# Altium PCB LM2596_PCB.PcbDoc
Units mm, origin at the board's own origin, x right, y up, seen from the top; angles counter-clockwise.
Board outline 51.43 x 25.02 mm, 2 copper layers (Top Layer, Bottom Layer); 8 components, 5 nets, 24 pads, 0 vias.
Unrouted connection lines stored in the file: 5.
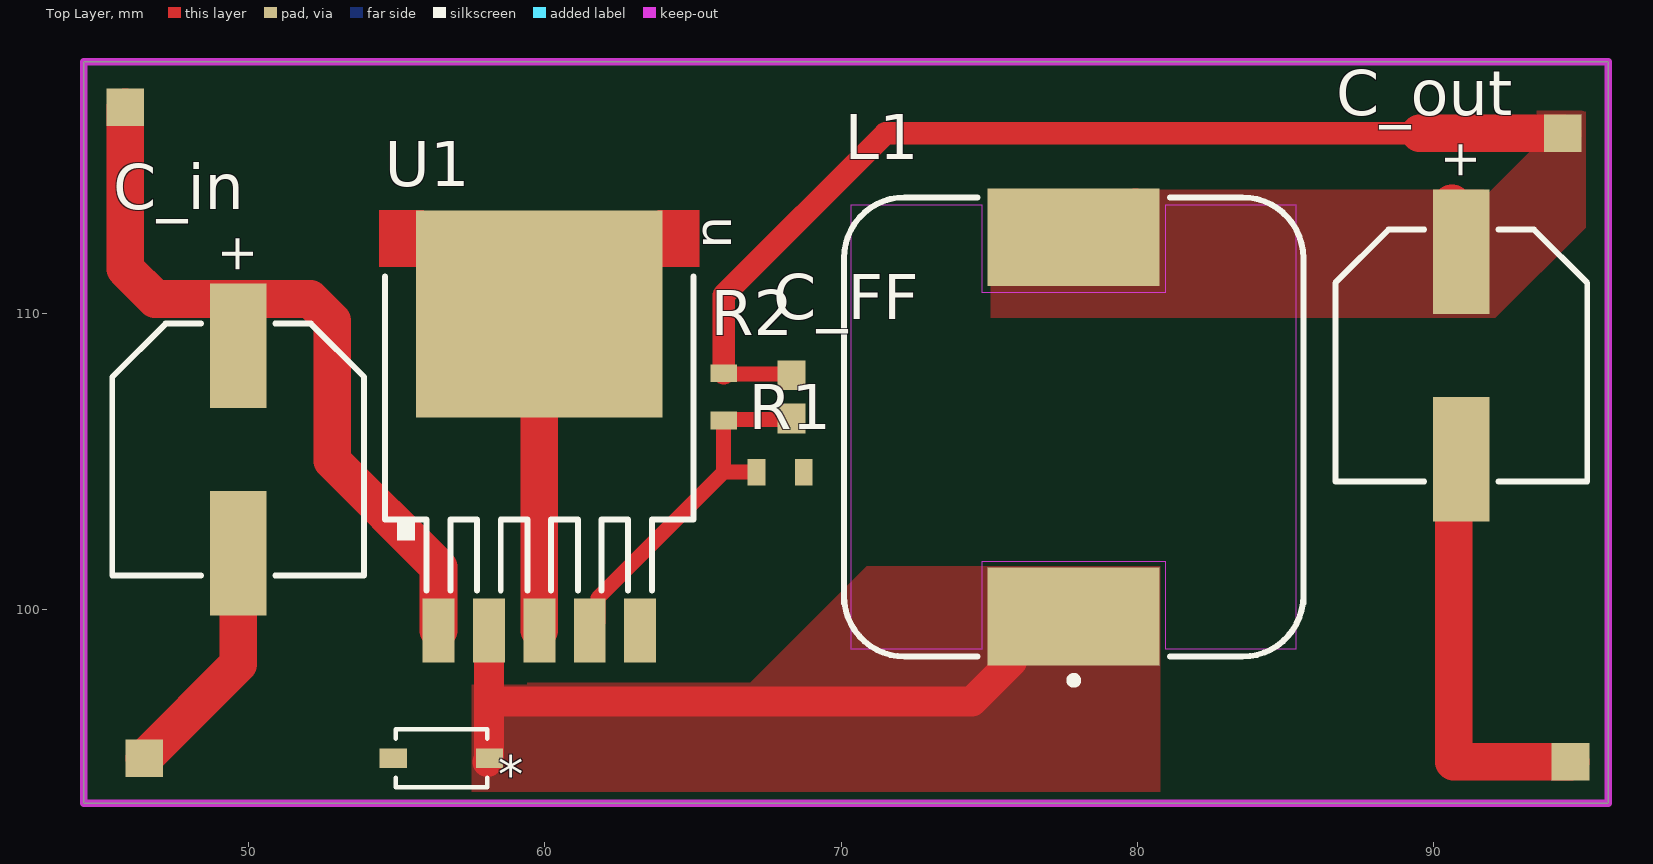
[diagram p0: Top Layer view]
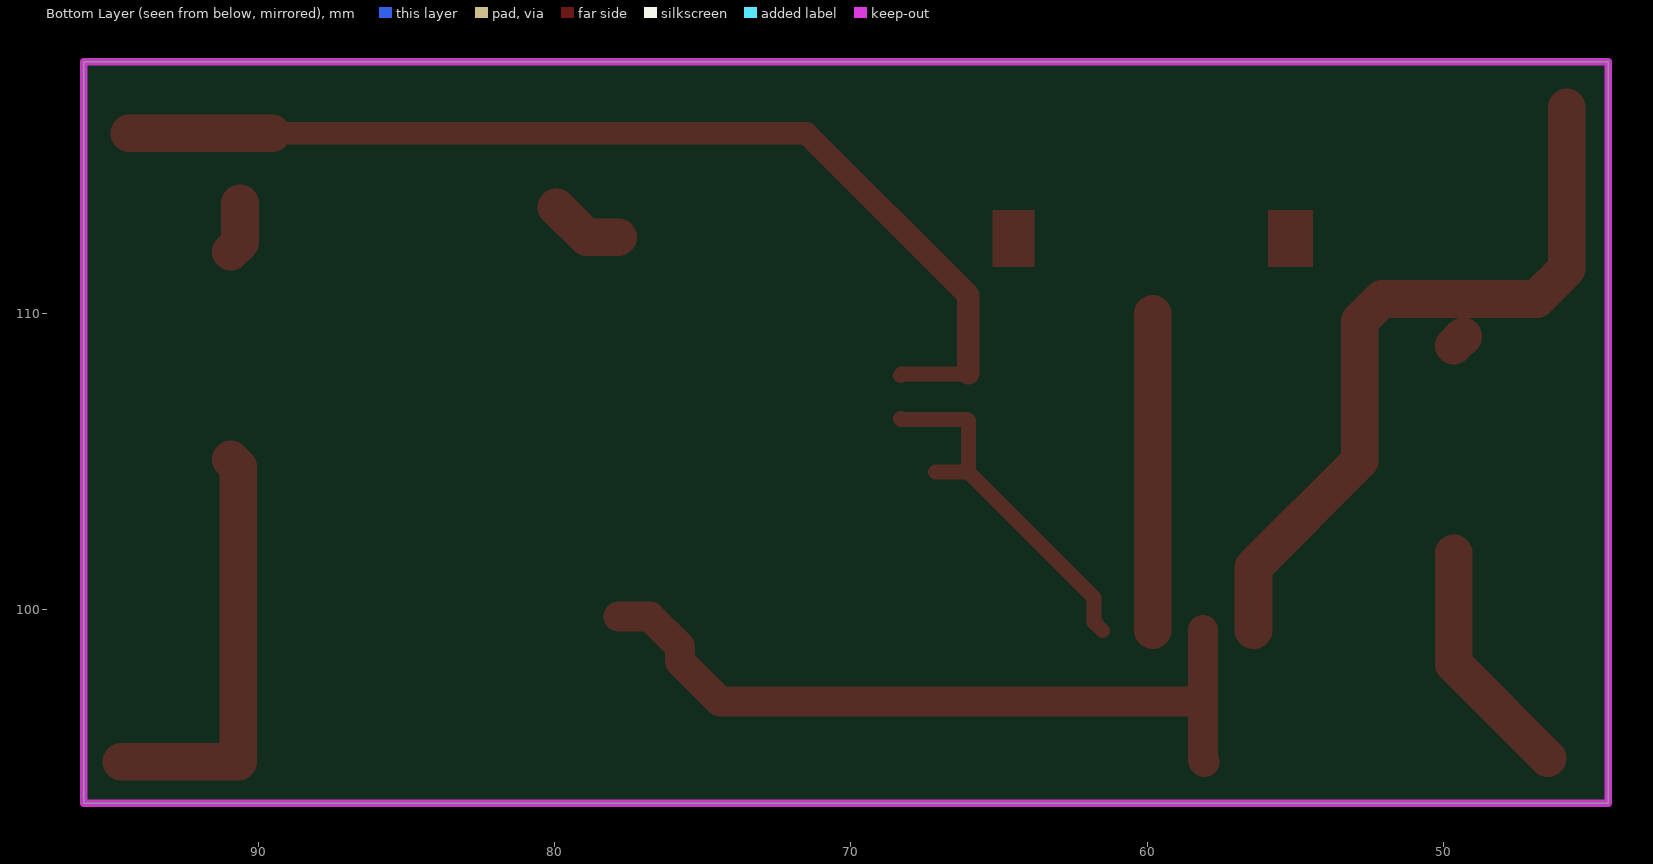
[diagram p1: Bottom Layer view, seen from below]
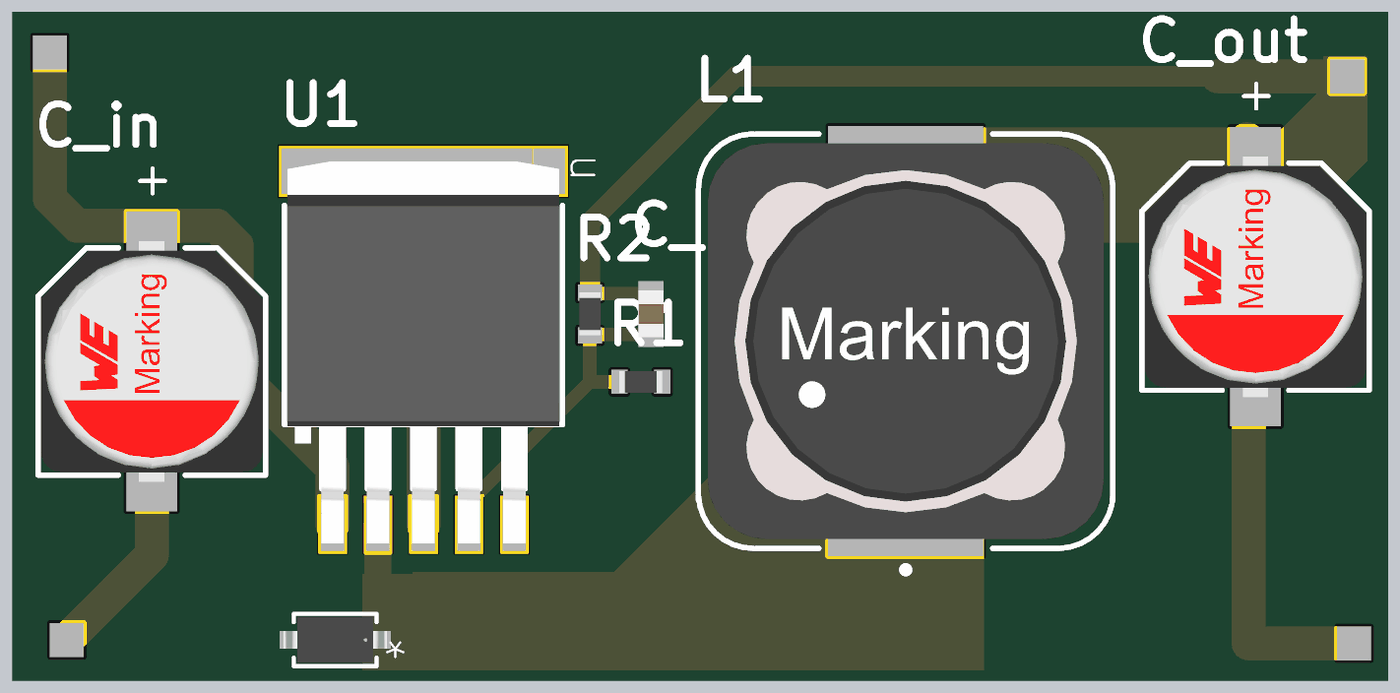
[diagram p2: 3D render of the assembled board from above, using the file's embedded part models]

## Layer stack, top to bottom
Top Solder: solder mask 0.0102, Solder Resist, Dk 3.5
Top Layer: signal copper 0.0356
Dielectric 1: dielectric 0.32, FR-4, Dk 4.8
Bottom Layer: signal copper 0.0356
Bottom Solder: solder mask 0.0102, Solder Resist, Dk 3.5

## Board outline
44.45,93.472 44.45,118.491 95.885,118.491 95.885,93.472

## Design rules (kind name [scope] priority, off if disabled: settings)
Clearance [All] p1: gap=0.254 ignorepadtopadclearanceinfootprint=FALSE
PolygonConnect PolygonConnect_2 [All vs IsNamedPolygon('NetC_FF_2')] p1: thpad.connectstyle=Direct thpad.reliefconductorwidth=0.254 thpad.reliefentries=4 thpad.polygonreliefangle="90 Angle" thpad.airgapwidth=0.254 smdpad.connectstyle=Direct smdpad.reliefconductorwidth=0.254 smdpad.reliefentries=4 smdpad.polygonreliefangle="90 Angle" smdpad.airgapwidth=0.254 via.connectstyle=Relief via.reliefconductorwidth=0.254 via.reliefentries=4 via.polygonreliefangle="90 Angle" via.airgapwidth=0.254
PolygonConnect PolygonConnect_1 [All vs IsNamedPolygon('NetC_FF_2')] p2: thpad.connectstyle=Direct thpad.reliefconductorwidth=0.254 thpad.reliefentries=4 thpad.polygonreliefangle="90 Angle" thpad.airgapwidth=0.254 smdpad.connectstyle=Direct smdpad.reliefconductorwidth=0.254 smdpad.reliefentries=4 smdpad.polygonreliefangle="90 Angle" smdpad.airgapwidth=0.254 via.connectstyle=Relief via.reliefconductorwidth=0.254 via.reliefentries=4 via.polygonreliefangle="90 Angle" via.airgapwidth=0.254
PolygonConnect [All] p3: connectstyle=Relief reliefconductorwidth=0.762 reliefentries=4 polygonreliefangle="90 Angle" airgapwidth=0.762
RoutingVias [All] p1: holewidth=0.762 width=1.27 viastyle="Through Hole" minholewidth=0.762 minwidth=1.27 maxholewidth=0.762 maxwidth=1.27
SolderMaskExpansion [All] p1: expansion=0.102 istentingtop=FALSE
Width [All] p1: maxlimit=1.27 minlimit=0.508 preferedwidth=0.762 minimp=50.000000 maximp=50.000000 favimp=50.000000
30 further rules are at their usual default settings.

## Classes and differential pairs
component class 01_Schematic: C_FF C_in C_out L1 R1 R2 U1

## Components (designator, comment, footprint, x,y, rotation, side; value= is the part's Value field where it differs from the comment)
C_FF "C1206C104K5RACTU" CAPC17595_87N_KEM_0603 68.326,107.188 r90 top
C_in "?µF" WCAP-AS5H_D8H10.5 49.657,105.41 r90 top
C_out "?µF" WCAP-AS5H_D8H10.5 90.932,108.585 r90 top
D1 "BZT52C5V1-E3-08" CR_5V1-E3-08_VIS-L 56.515,94.996 r180 top
L1 "?uH, ?A" WE-PD_1510 77.851,106.172 r0 top
R1 "Ω" WRIS-PSMB_0603_L1.6W0.8H0.3 67.945,104.648 r180 top
R2 "Ω" WRIS-PSMB_0603_L1.6W0.8H0.3 66.04,107.188 r90 top
U1 "LM2596S-12/NOPB" KTT0005B 59.817,104.648 r270 top

## Footprints (in the part's own frame and the unit in brackets; to place one, negate y for a bottom-side part, rotate by r counter-clockwise, add the part's x,y. Pads: shape width x height; smd on the part's side, far side on the other; paste and mask are expansions set on the pad)
CAPC17595_87N_KEM_0603 [mm]
  rect 1.006x0.95 smd paste+0 mask+0: 1(-0.728,0) 2(0.728,0)
  body extent -0.87,-0.48 0.87,0.48, height 0.87
CR_5V1-E3-08_VIS-L [mil]
  rect 36x26 smd paste+0 mask+0: 1(-64,0) 2(64,0)
  silkscreen extent -61,-39 61,39, body extent -76,-34 76,34, height 53
KTT0005B [mm]
  rect 2.16x1.07 smd paste-0.102 mask+0.051: 1(5.338,-3.4) 2(5.338,-1.7) 3(5.338,0.005) 4(5.338,1.7) 5(5.338,3.4)
  rect 6.99x8.33 smd paste-0.102 mask+0.051: 6(-5.338,0)
  Top Layer region: -8.832,5.4 -8.832,4 -6.923,4 -6.923,5.4
  Top Layer region: -8.832,-3.9 -8.832,-5.4 -6.923,-5.4 -6.923,-3.9
  silkscreen extent -6.6,-5.2 4,5.2, body extent -8.26,-5.08 6.05,5.08, height 4.57
WCAP-AS5H_D8H10.5 [mm] "Aluminum Electrolytic Capacitors, 8x10.5mm"
  rect 4.2x1.9 smd: 1(3.5,0) 2(-3.5,0)
  silkscreen extent -4.25,-4.25 4.25,4.25, body extent -4.5,-4.15 4.5,4.15, height 10.5
WE-PD_1510 [mm] "SMT Shielded Power Inductor, 2-leads, body 15x15mm"
  rect 5.8x3.3 smd: 1(0,-6.4) 2(0,6.4)
  Top Layer keep-out region: -7.5,7.5 -3.1,7.5 -3.1,4.55 3.1,4.55 3.1,7.5 7.5,7.5 7.5,-7.5 3.1,-7.5 3.1,-4.55 -3.1,-4.55 -3.1,-7.5 -7.5,-7.5
  silkscreen extent -7.75,-8.67 7.75,7.75, body extent -7.4,-7.4 7.4,7.4, height 9.5
WRIS-PSMB_0603_L1.6W0.8H0.3 [mm] "Metal Plate Resistor, SMT, body size 1.6x0.8mm"
  rect 0.6x0.9 smd: 1(-0.8,0) 2(0.8,0)
  body extent -0.8,-0.4 0.8,0.4, height 0.3

## Part data
C_FF: library part Capacitor_SMD, "No Description Available", Mfr_Name=Kemet, Copyright="Copyright (C) 2023 Ultra Librarian. All rights reserved.", Manufacturer_Part_Number=C1206C104K5RACTU, RefDes=RefDes, Type=DEV
C_in C_out: library part Capacitor_Alumanium_SMD, "WCAP-AS5H Aluminum Electrolytic Capacitor, V-Chip, D10 x H10.5mm, 330µF, 50V", Capacitance=330µF, Capacitance Tolerance=+/-20%, Leakage Current=165µA, Manufacturer="Wurth Elektronik", Manufacturer Part Number=865230657014, Operating Temperature Max=105°C, Operating Temperature Min=-55°C, Rated Voltage (DC)=50V, Ripple Current=900mA, Category="Aluminum Electrolytic Capacitors", ComponentLink1Description="Website Link", ComponentLink1URL=https://www.we-online.com/redexpert/article/865230657014?ad, ComponentLink2Description="Datasheet Link", ComponentLink2URL=https://www.we-online.com/redexpert/spec/865230657014?ad, Diameter=10mm, Dissipation Factor=12%, Endurance=5000h, Height=10.5mm, Match Code=WCAP-AS5H, Mount="Surface Mount", Packaging="Tape and Reel", Technical Reference=ASEF105331M050DVCTEE000
D1: "No Description Available", Mfr_Name=Vishay, Copyright="Copyright (C) 2023 Ultra Librarian. All rights reserved.", Manufacturer_Part_Number=BZT52C5V1-E3-08, RefDes=RefDes, Type=DEV
L1: library part Inductor_SMD, "WE-PD SMT Power Inductor, size ?, ?uH, ?A, ?Ohm", Case/Size Code=1210, DC Resistance=1800mOhm, DC Resistance Max=2300mOhm, Inductance=1500uH, Manufacturer="Wurth Elektronik", Manufacturer Part Number=7447709152, Operating Temperature Max=125°C, Operating Temperature Min=-40°C, Rated Current=0.8A, Self Resonant Frequency=0.9MHz, Category="Power Inductors", ComponentLink1Description="Website Link", ComponentLink1URL=https://www.we-online.com/redexpert/article/7447709152?ad, ComponentLink2Description="Datasheet Link", ComponentLink2URL=https://www.we-online.com/redexpert/spec/7447709152?ad, Height=10mm, Length=12mm, Match Code=WE-PD, Mount="Surface Mount", Packaging="Tape and Reel", Saturation Current=0.8A, Type=Standard, Width=12mm
R1 R2: library part Resistor_SMD, "WRIS-PSMC Metal Plate Resistor, SMT, size 2512, 2W, 5mΩ, +/-1%", Case/Size Code=2512, Manufacturer="Wurth Elektronik", Manufacturer Part Number=580070763005, Operating Temperature Max=155°C, Operating Temperature Min=-55°C, Rated Current=20A, Rated Power=2W, Resistance=5mΩ, Resistance Tolerance=+/-1%, Temperature Coefficient of Resistance=+/-100ppm/°C, Category="Metal Plate Resistors", ComponentLink1Description="Website Link", ComponentLink1URL=https://www.we-online.com/redexpert/article/580070763005?ad, ComponentLink2Description="Datasheet Link", ComponentLink2URL=https://www.we-online.com/redexpert/spec/580070763005?ad, Height=0.51mm, Length=6.3mm, Match Code=WRIS-PSMC, Mount="Surface Mount", Packaging="Tape and Reel", Technical Reference=MC2512R005F201KAATE0000, Width=3.1mm
U1: "No Description Available", Alternate_PartNumber=LM2596S-ADJ/NOPB, Manufacturer="Texas Instruments", PartNumber=LM2596SX-ADJ/NOPB, CompType=IC, Copyright="Copyright (C) 2023 Ultra Librarian. All rights reserved.", Manufacturer_Part_Number=LM2596S-12/NOPB, Mfr_Name="Texas Instruments", MountType=SMT, PackageReference=KTT0005B, RefDes=RefDes, RoHS=Y, Type=DEV

## Free pads (board coordinates)
  rect 1.27x1.27 smd: 4(45.847,116.967) 4(46.482,94.996) 4(94.361,116.078) 4(94.615,94.869)

## Nets (pads, with @x,y where several pads share a name; then routed paths per layer and width w, separated by ;. In a path a pad name is that pad's centre, name@x,y a point inside that pad or via, vN(x,y) a via of type N, cw(c..) or ccw(c..) an arc to the next point about the centre after c; other vN are vias at no path point)
GND: C_in.2 C_out.2 D1.2 pad.4@46.482,94.996 pad.4@94.615,94.869 R1.1 U1.3 U1.5 U1.6 | length 33.2
  Top Layer w1.27: pad.4@46.482,94.996 49.657,98.171 C_in.2 ; U1.6 59.822,109.98 U1.3 ; C_out.2 90.678,104.831 90.678,94.869 94.234,94.869 pad.4@94.615,94.869
IN+: C_in.1 pad.4@45.847,116.967 U1.1 | length 25.5
  Top Layer w1.27: pad.4@45.847,116.967 45.847,111.506 46.863,110.49 52.088,110.49 52.832,109.746 52.832,105.029 56.417,101.444 U1.1 ; C_in.1@49.342,109.225 C_in.1
NetC_FF_1: C_FF.1 R1.2 R2.1 U1.4 | length 12.4
  Top Layer w0.508: U1.4 61.798,99.592 61.798,100.406 66.04,104.648 ; R1.2 66.04,104.648 ; C_FF.1 68.29,106.424 66.076,106.424 R2.1 66.04,104.648
NetC_FF_2: C_FF.2 C_out.1 L1.2 pad.4@94.361,116.078 R2.2 | length 39.8
  Top Layer w0.508: R2.2 66.076,107.952 68.29,107.952 C_FF.2
  Top Layer w0.762: R2.2 66.04,110.617 71.501,116.078 89.535,116.078
  Top Layer w1.27: L1.2 78.92,112.572 L1.2@79.935,113.587 ; 89.535,116.078 pad.4@94.361,116.078 ; C_out.1@90.617,113.726 90.617,112.4 C_out.1
NetD1_1: D1.1 L1.1 U1.2 | length 25.7
  Top Layer w1.016: D1.1@58.064,94.869 58.117,94.922 58.117,96.901 ; U1.2 58.117,96.901 ; L1.1 76.782,99.772 75.767,98.757 75.767,98.251 74.417,96.901 58.117,96.901

## Polygon pours and split planes (outlines as drawn)
NetC_FF_2 on Top Layer "NetC_FF_2" (solid, pour order 1): 75.057,114.173 91.694,114.173 91.821,114.046 93.472,115.697 93.472,116.84 94.996,116.84 95.123,116.967 95.123,112.903 92.075,109.855 75.057,109.855
NetD1_1 on Top Layer "NONET_L-01_P-001" (solid, remove dead copper, pour order 0): 58.674,97.536 58.674,100.457 57.531,100.457 57.531,93.726 80.772,93.726 80.772,101.473 70.866,101.473 66.929,97.536

## Keep-outs
Keep-Out Layer:
  the board outline again, w0.254

## Text inside footprints (layer, text, board x,y; h text height)
C_in: Top Overlay "+" at 50.157,111.31 h1.22 r90
C_out: Top Overlay "+" at 91.432,114.485 h1.22 r90
D1: Top Overlay "*" at 59.296,95.631 h1.27 r180; Mechanical 13 "*" at 58.001,95.631 h1.27 r180
U1: Top Overlay "u" at 65.354,113.284 h1.27 r270